# Altium PCB SUBBOARD-gate_driver.PcbDoc
Units mm, origin at the board's own origin, x right, y up, seen from the top; angles counter-clockwise.
Board outline 21 x 23.5 mm, 4 copper layers (Top Layer, Int1 (GND), Int2 (PWR), Bottom Layer), stack 1.369 mm thick; 27 components, 19 nets, 77 pads, 36 vias.
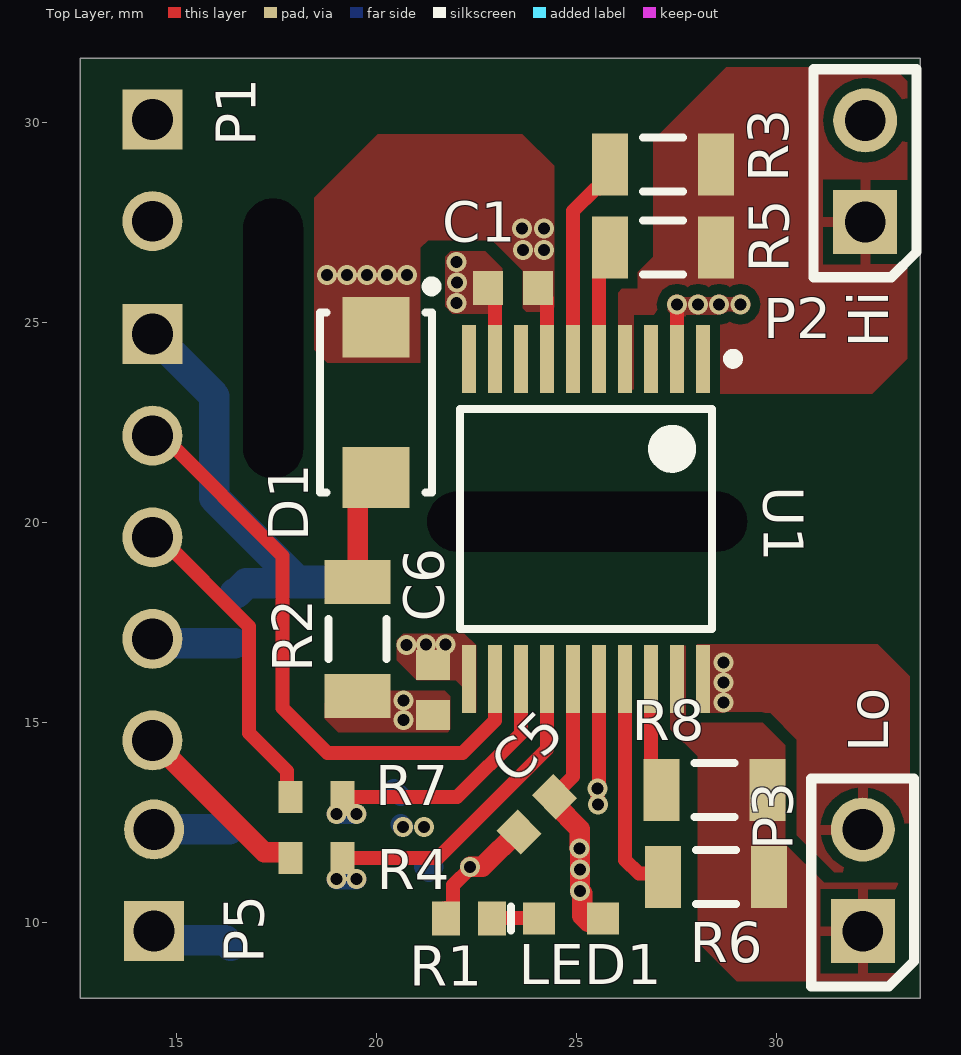
[diagram p0: Top Layer view]
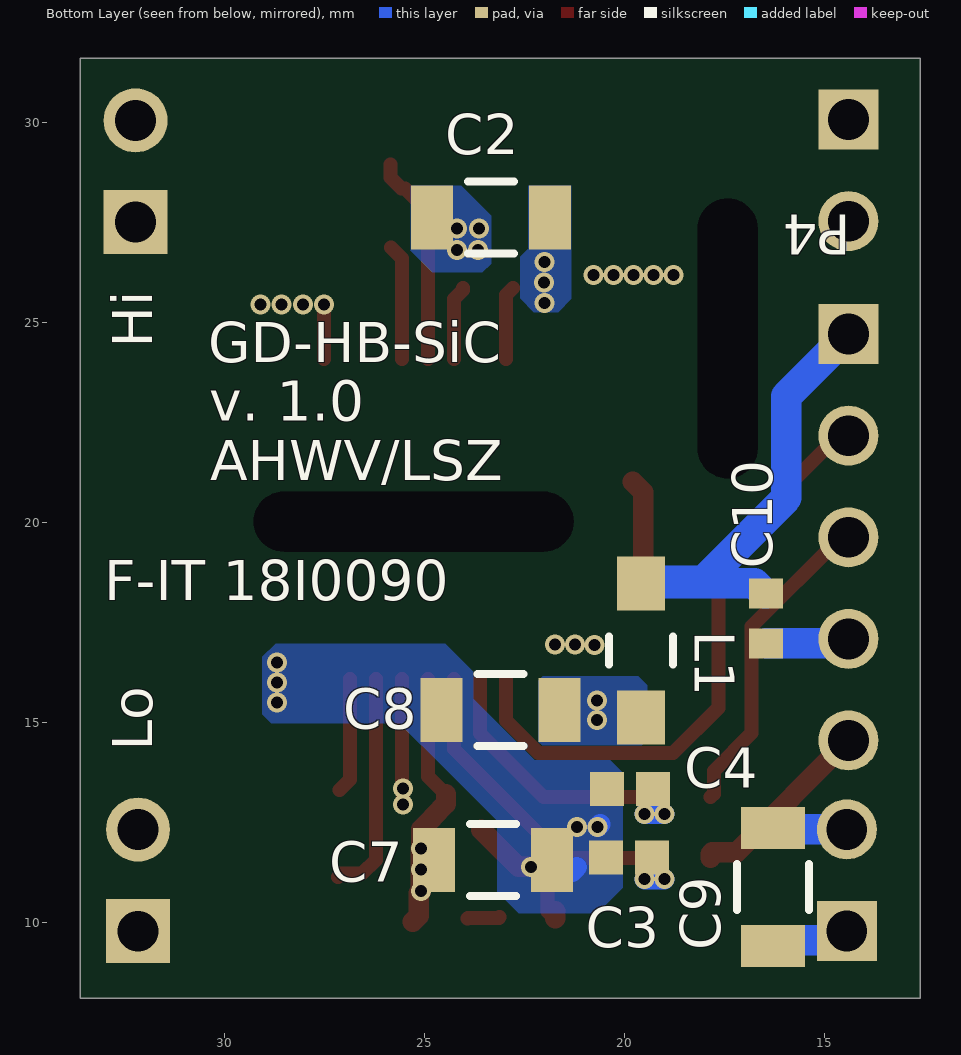
[diagram p1: Bottom Layer view, seen from below]
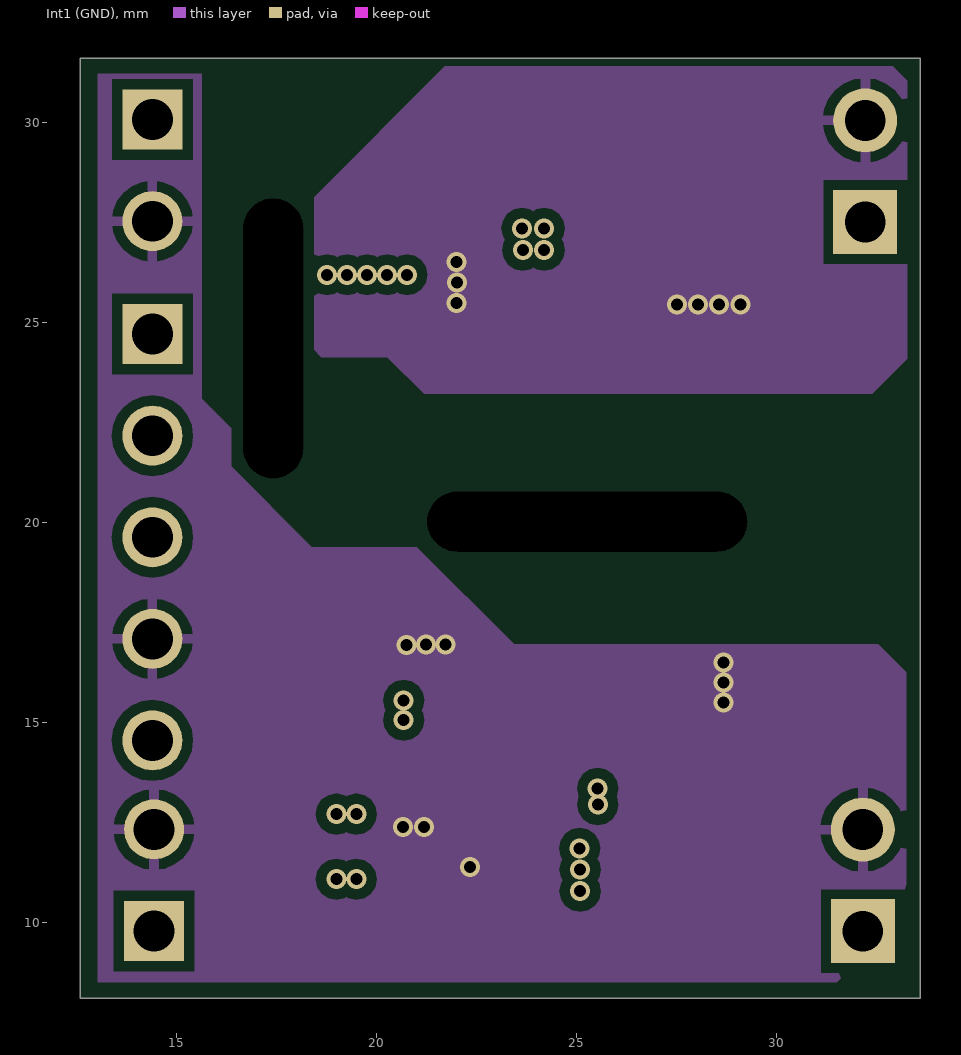
[diagram p2: Int1 (GND)]
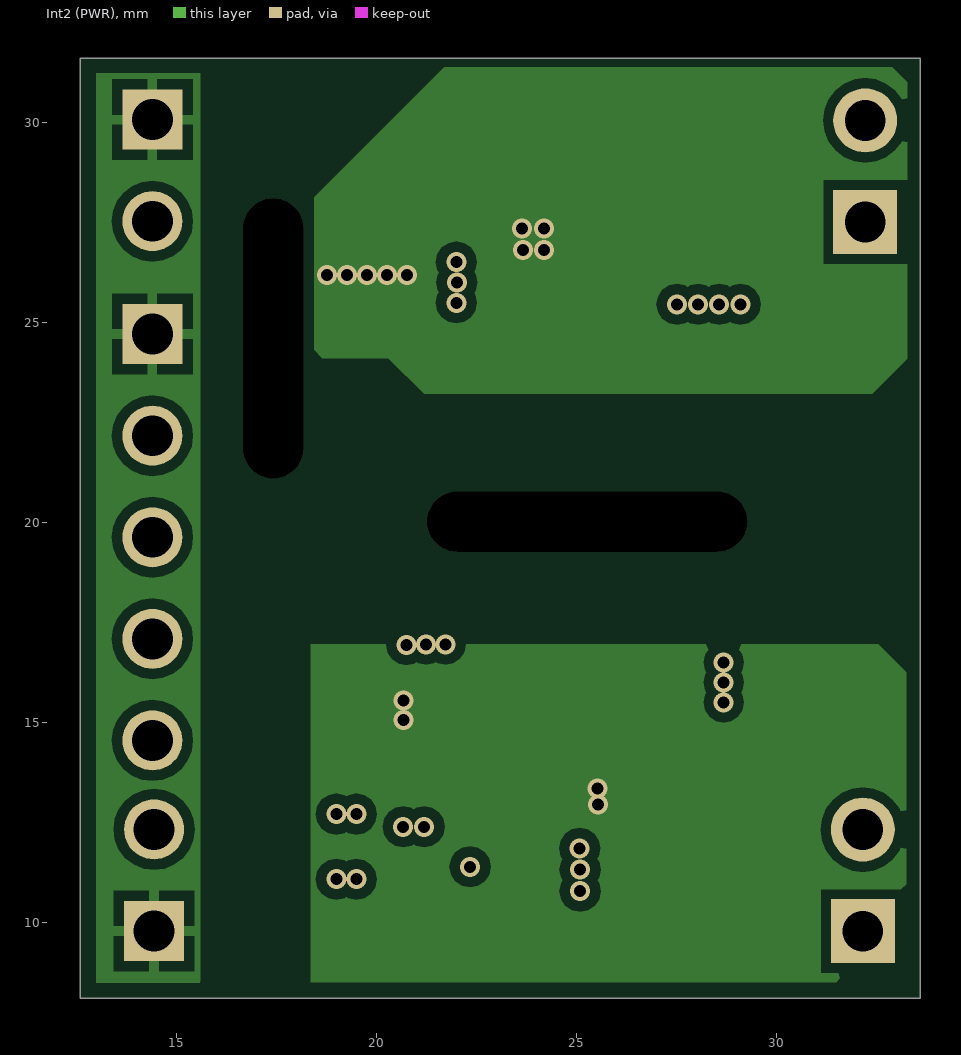
[diagram p3: Int2 (PWR)]
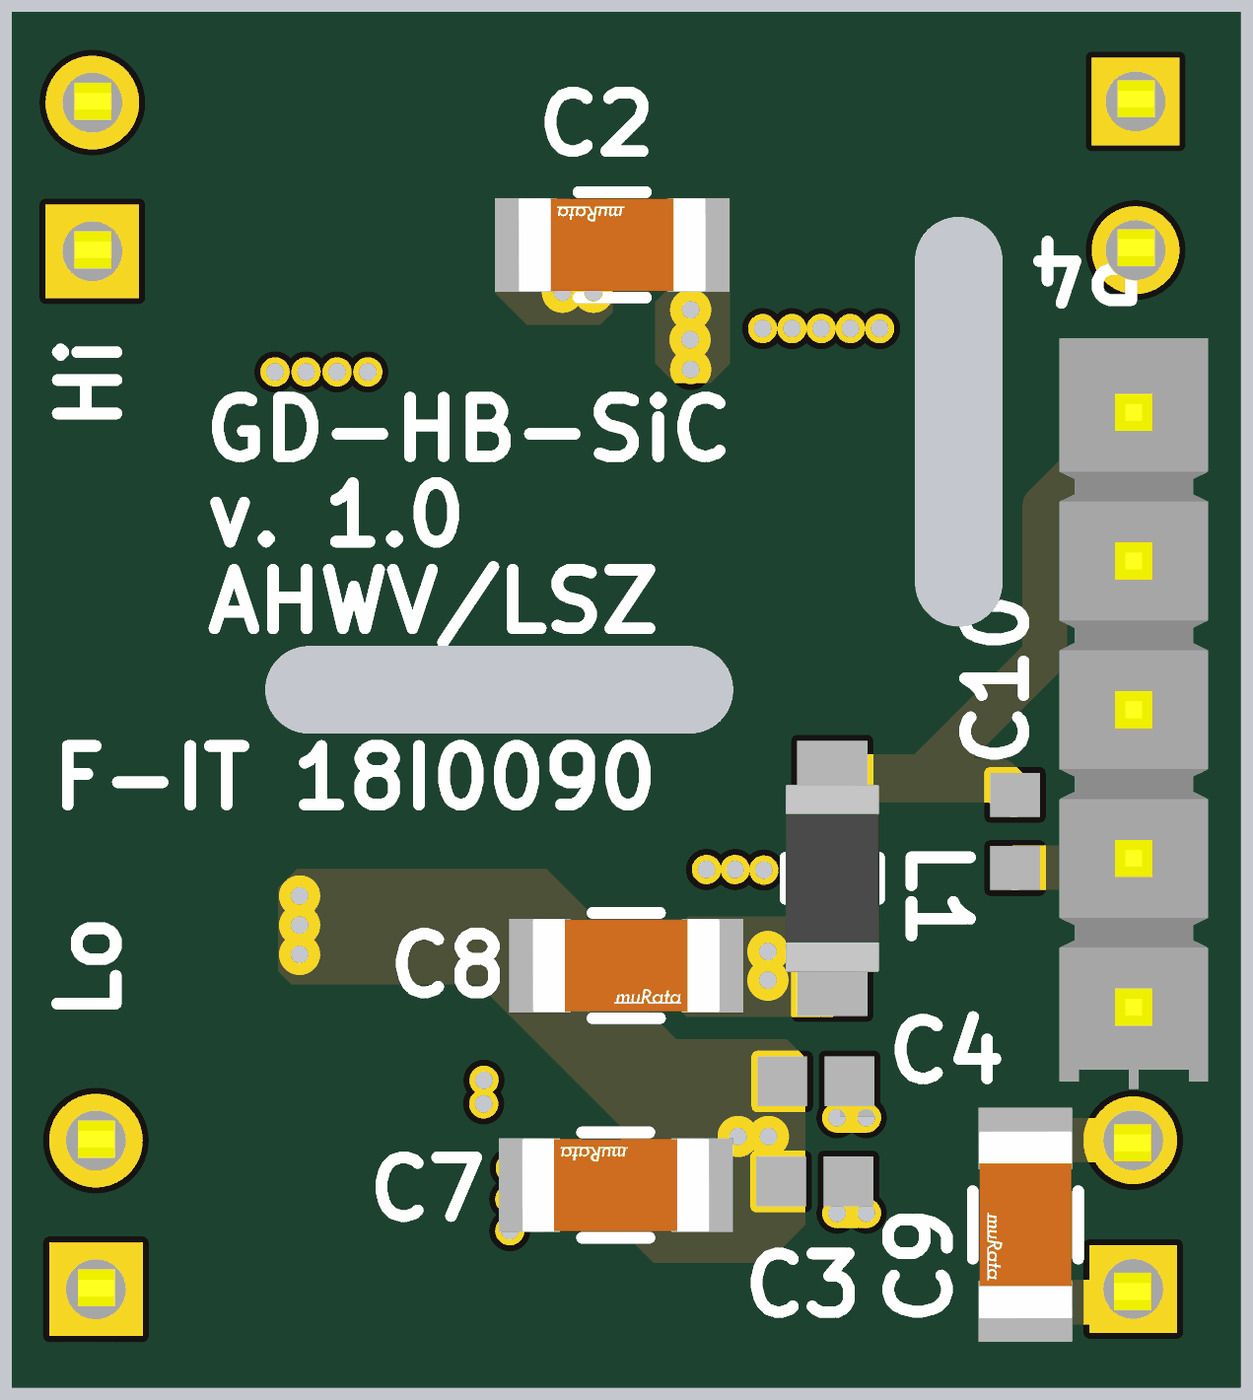
[diagram p4: 3D render of the assembled board from below, using the file's embedded part models]

## Layer stack, top to bottom
Top Solder: solder mask 0.0254, SM-001, Dk 4
Top Layer: signal copper 0.035
Dielectric 1: prepreg 0.1295, PP-017, Dk 4.3
Dielectric 2: prepreg 0.1295, PP-017, Dk 4.3
Int1 (GND): signal copper 0.035
Dielectric 3: core 0.7112, Core-039, Dk 4.8
Int2 (PWR): signal copper 0.035
Dielectric 4: prepreg 0.1295, PP-017, Dk 4.3
Dielectric 5: prepreg 0.1295, PP-017, Dk 4.3
Bottom Layer: signal copper 0.035
Bottom Solder: solder mask 0.0254, SM-001, Dk 4

## Board outline
12.6,8.11 12.6,31.61 33.6,31.61 33.6,8.11

## Design rules (kind name [scope] priority, off if disabled: settings)
Clearance [All] p1: gap=0.254 ignorepadtopadclearanceinfootprint=FALSE except(0: Arc-Hole Track-Hole SMDPad-Hole THPad-Hole Via-Hole Fill-Hole Poly-Hole Region-Hole Text-Hole)
PolygonConnect [All] p1: thpad.connectstyle=Relief thpad.reliefconductorwidth=0.254 thpad.reliefentries=4 thpad.polygonreliefangle="90 Angle" thpad.airgapwidth=0.254 smdpad.connectstyle=Direct smdpad.reliefconductorwidth=0.254 smdpad.reliefentries=4 smdpad.polygonreliefangle="90 Angle" smdpad.airgapwidth=0.254 via.connectstyle=Direct via.reliefconductorwidth=0.254 via.reliefentries=4 via.polygonreliefangle="90 Angle" via.airgapwidth=0.254
RoomDefinition SUBBOARD-gate_driver [InComponentClass('SUBBOARD-gate_driver')] p1: confinementstyle=ConfineIn formatcopy=TRUE lockcomponents=FALSE outline 2.76,4.09 112.325,4.09 112.325,66.3 2.76,66.3
RoutingVias [All] p1: holewidth=0.3 width=0.5 viastyle="Through Hole" minholewidth=0.3 minwidth=0.5 maxholewidth=1 maxwidth=2
SolderMaskExpansion [All] p1: expansion=0.102 istentingtop=FALSE
Width Width_G [InNet('G')] p1: maxlimit=1.016 minlimit=0.254 preferedwidth=0.381 minimp=50.000000 maximp=50.000000 favimp=50.000000
Width [All] p2: maxlimit=0.762 minlimit=0.254 preferedwidth=0.35 minimp=50.000000 maximp=50.000000 favimp=50.000000
30 further rules are at their usual default settings.

## Components (designator, comment, footprint, x,y, rotation, side; value= is the part's Value field where it differs from the comment)
C1 "CL10B104KB8NNNC" SAMS-C0603-2_L 23.41,25.87 r180 top
C2 "GRT31CR61H106KE01L" FP-GRT31-0_2-MFG 23.34,27.63 r0 bottom value=10uF
C3 "LMK107B7105KA-T" CAPC1608X90X35LL10T25 19.88,11.63 r0 bottom
C4 "LMK107B7105KA-T" CAPC1608X90X35LL10T25 19.86,13.34 r0 bottom
C5 "CL10B104KB8NNNC" SAMS-C0603-2_L 24.01,12.71 r225 top
C6 "CL10B104KB8NNNC" SAMS-C0603-2_L 21.42,15.82 r90 top
C7 "GRT31CR61H106KE01L" FP-GRT31-0_2-MFG 23.28,11.57 r0 bottom value=10uF
C8 "GRT31CR61H106KE01L" FP-GRT31-0_2-MFG 23.1,15.32 r180 bottom value=10uF
C9 "GRT31CR61H106KE01L" FP-GRT31-0_2-MFG 16.28,10.89 r270 bottom value=10uF
C10 "CL10B104KB8NNNC" SAMS-C0603-2_L 16.46,17.61 r270 bottom
D1 "BYG23T-M3/TR" BYG23T-M3/TR 19.99,23.01 r270 top
L1 "742792121" SMD-1206 19.58,16.81 r270 bottom
LED1 "150060BS75000" 0603_A 24.86,10.11 r0 top
P1 "TSW-102-05-G-S" TSW-102-05-G-S 14.4,30.08 r0 top
P2 "TSW-102-07-F-S" TSW-102-07-F-S 32.22,27.52 r90 top
P3 "TSW-102-07-F-S" TSW-102-07-F-S 32.16,9.79 r90 top
P4 "TSW-105-07-G-S" TSW-105-07-G-S 14.4,24.719 r180 bottom
P5 "TSW-102-05-G-S" TSW-102-05-G-S 14.44,9.796 r180 top
R1 "CRCW060382R0FKEA" RESC1609X50X30LL10T20 22.32,10.11 r180 top value="82 Ohms"
R2 "ERJ8BQF2R2V" RESC3216X70X50NL05T20 19.53,17.09 r90 top
R3 "ERJ8BWFR100V" RESC3216X70X50LL05T20 27.16,28.96 r180 top value="0.1 Ohm"
R4 "RC0603FR-070RL" RESC1608X55X25LL10T15 18.5,11.62 r180 top
R5 "ERJ8BWFR100V" RESC3216X70X50LL05T20 27.16,26.88 r180 top value="0.1 Ohm"
R6 "ERJ8BWFR100V" RESC3216X70X50LL05T20 28.49,11.15 r180 top value="0.1 Ohm"
R7 "RC0603FR-070RL" RESC1608X55X25LL10T15 18.5,13.14 r180 top
R8 "ERJ8BWFR100V" RESC3216X70X50LL05T20 28.45,13.32 r180 top value="0.1 Ohm"
U1 "BM60212FV" SOP65P810X190-20N 25.24,20.1 r270 top

## Footprints (in the part's own frame and the unit in brackets; to place one, negate y for a bottom-side part, rotate by r counter-clockwise, add the part's x,y. Pads: shape width x height; smd on the part's side, far side on the other; paste and mask are expansions set on the pad)
0603_A [mm] "Chip LED, 2-Leads, Body 1.6x0.8mm, IPC Medium Density"
  rect 0.8x0.8 smd: 1(-0.8,0) 2(0.8,0)
  silkscreen extent -1.5,-0.3 -1.5,0.3, body extent -0.8,-0.4 0.8,0.4, height 0.7
BYG23T-M3/TR [mm] "Fast / Ultrafast Diode, 1.3 kV, 1 A, Single, 1.9 V, 75 ns, 18 A"
  rect 1.52x1.68 smd: 1(-1.88,0) 2(1.88,0)
  silkscreen extent -3.02,-1.4 2.25,1.52, body extent -2.25,-1.39 2.25,1.4, height 2.29
CAPC1608X90X35LL10T25 [mm] "Chip Capacitor, 2-Leads, Body 1.70x0.90mm, IPC High Density"
  rect 0.85x0.85 smd: 1(-0.575,0) 2(0.575,0)
  body extent -0.85,-0.45 0.85,0.45, height 0.9
FP-GRT31-0_2-MFG [mm]
  rect 1.05x1.6 smd paste+0 mask+0: 1(-1.475,0) 2(1.475,0)
  silkscreen extent -0.58,-0.9 0.58,0.9, body extent -1.6,-0.8 1.6,0.8, height 1.8
RESC1608X55X25LL10T15 [mm] "Chip Resistor, 2-Leads, Body 1.60x0.80mm, IPC High Density"
  rect 0.6x0.8 smd: 1(-0.65,0) 2(0.65,0)
  body extent -0.85,-0.45 0.85,0.45, height 0.55
RESC1609X50X30LL10T20 [mm] "Chip Resistor, 2-Leads, Body 1.55x0.85mm, IPC High Density"
  rect 0.7x0.85 smd: 1(-0.575,0) 2(0.575,0)
  body extent -0.82,-0.48 0.82,0.48, height 0.5
RESC3216X70X50LL05T20 [mm] "Chip Resistor, 2-Leads, Body 3.20x1.60mm, IPC High Density"
  rect 0.9x1.55 smd: 1(-1.325,0) 2(1.325,0)
  silkscreen extent -0.5,-0.67 0.5,0.67, body extent -1.63,-0.82 1.62,0.82, height 0.7
RESC3216X70X50NL05T20 [mm] "Chip Resistor, 2-Leads, Body 3.20x1.60mm, IPC Medium Density"
  rect 1.1x1.65 smd: 1(-1.425,0) 2(1.425,0)
  silkscreen extent -0.5,-0.72 0.5,0.72, body extent -1.63,-0.82 1.62,0.82, height 0.7
SAMS-C0603-2_L [mm] "Chip Capacitor, 2-Leads, Body 1.70x0.90mm, IPC High Density"
  rect 0.75x0.85 smd: 1(-0.625,0) 2(0.625,0)
  body extent -0.85,-0.45 0.85,0.45, height 0.9
SMD-1206 [mm] "Chip Inductor, 2-Leads, Body 3.2x1.6mm"
  rect 1.35x1.2 smd: 1(-1.675,0) 2(1.675,0)
  silkscreen extent -0.35,-0.8 0.35,0.8, body extent -1.6,-0.8 1.6,0.8, height 1.09
SOP65P810X190-20N [mm] "SOP, 20-Leads, Body 6,50x6,10mm, Pitch 0,65mm, IPC Medium Density"
  rect 1.7x0.35 smd: 1(-4,2.925) 2(-4,2.275) 3(-4,1.625) 4(-4,0.975) 5(-4,0.325) 6(-4,-0.325) 7(-4,-0.975) 8(-4,-1.625) 9(-4,-2.275) 10(-4,-2.925) 11(4,-2.925) 12(4,-2.275) 13(4,-1.625) 14(4,-0.975) 15(4,-0.325) 16(4,0.325) 17(4,0.975) 18(4,1.625) 19(4,2.275) 20(4,2.925)
  silkscreen extent -4.12,-3.15 2.75,3.8, body extent -3.15,-3.15 3.15,3.15, height 1.9
TSW-102-05-G-S [mm]
  rect 1.5x1.5 hole 1.02: 1(0,0)
  round 1.5 hole 1.02: 2(0,-2.54)
  body extent -1.28,-3.89 1.26,1.31, height 5.22
TSW-102-07-F-S [mm] "Conn Unshrouded Header HDR 2 POS 2.54mm Solder ST Thru-Hole"
  rect 1.6x1.6 hole 1.02: 1(0,0)
  round 1.6 hole 1.02: 2(2.54,0)
  silkscreen extent -1.38,-1.28 3.82,1.29, body extent -1.37,-1.26 3.83,1.28, height 8.38
TSW-105-07-G-S [mm]
  rect 1.5x1.5 hole 1.02: 1(0,0)
  round 1.5 hole 1.02: 2(0,-2.54) 3(0,-5.08) 4(0,-7.62) 5(0,-10.16)
  body extent -1.3,-11.51 1.24,1.32, height 8.39

## Part data
C1 C5 C6 C10: library part CMP-2000-05332-1, "Multi-layer Ceramic Capacitor, -55 to 125 degC, 2-Pin SMD (0603), RoHS, Tape and Reel", Capacitance=0.1µF, Case Size/Dimension=0603, Dielectric=X7R, Manufacturer="Samsung Electro-Mechanics", Rated Voltage=50V, Tolerance (%)=±10%, Datasheet URL=https://datasheet.ciiva.com/29198/456651-da-01-en-vs-kondensator-0605-29198839.pdf, Datasheet Version=Nov-10, Manufacturer URL=http://www.samsungsem.com/global/index.jsp
C2 C7 C8 C9: library part CMP-06035-000076-1, "CAP CER 10UF 50V X5R 1206", Capacitance=10uF, Manufacturer=Murata, Package=GRT31-0.2, Temperature="-55°C to +85°C", Temperature Characteristic=X5R, Temperature Coefficient=15%, Temperature Range High=+85°C, Temperature Range Low=-55°C, Tolerance=10%, Voltage Rating=50V, Automotive=Yes, Automotive Grade="Grade 3", Category=Cap, ComponentLink2Description=Datasheet, ComponentLink2URL=https://search.murata.co.jp/Ceramy/image/img/A01X/G101/ENG/GRT31CR61H106KE01-01.pdf, Device Class L1="Passive Components", Device Class L2=Capacitors, Device Class L3="Ceramic Capacitors", Digikey Description="CAP CER 10UF 50V X5R 1206", Height=1.8mm, Ipc Land Pattern Name=CAPC320160X160, Lead Free=Yes, Manufacturer Part Number=GRT31CR61H106KE01L, Material=Ceramic, Octopart=https://octopart.com/grt31cr61h106ke01l-murata-62921736, RoHS=TRUE
C3 C4: library part CMP-2000-05445-1, "High Value Multilayer Ceramic Capacitor, 1 uF, +/- 10%, 10 V, -55 to 125 degC, 0603 (1608 Metric), RoHS, Tape and Reel", Capacitance=1µF, Manufacturer="Taiyo Yuden", Operating Temperature=-55degC~125degC, Package / Case=0603(1608Metric), Package Description="2-Pin Surface Mount Device, Body 1.6 x 0.8 mm", Package Reference=603, PCN Part Number=X5R,X7RDielectrics23/Jan/2008, Ratings=-, Standard Package=1, Temperature Coefficient=X7R, Tolerance=±10%, Voltage - Rated=10V, Applications=GeneralPurpose, Catalog Drawings=xMKSeries_0603_0.8, Category=Capacitors, Datasheet URL=https://datasheet.ciiva.com/30248/464lmk107b7105ka-t-30248417.pdf, Datasheet Version=Apr-14, Family=CeramicCapacitors, Features=-, Height - Seated (Max)=-, Kits=587-1797-KIT-ND-KITCAPCERHICAP0603&0805S, Lead Spacing=-, Lead Style=-, Manufacturer URL=http://www.t-yuden.com/, Mounting Type=SurfaceMount,MLCC, Online Catalog=MSeries, Other Names=587-1242-1, Packaging=CutTape(CT), Series=M, Size / Dimension="0.063\"Lx0.031\"W(1.60mmx0.80mm)", Thickness (Max)="0.035\"(0.90mm)"
D1: "DIODE AVALANCHE 1300V 1A DO214AC", Average Rectified Current=1A, Case/Package=SMA, Forward Voltage=1.9V, Manufacturer="Vishay Semiconductors", Max Forward Surge Current (Ifsm)=18A, Max Operating Temperature=150°C, Max Power Dissipation=800mW, Max Repetitive Reverse Voltage (Vrrm)=1.3kV, Min Operating Temperature=-55°C, Package Quantity=1, Peak Reverse Current=5uA, Supplier Part Number 1=70AC6454, Zener Voltage=200V, Category="Rectifier Diodes", ComponentLink1Description=https://datasheet.ciiva.com/23642/byg23t-23642320.pdf?src-supplier=Newark, ComponentLink1URL=https://datasheet.ciiva.com/23642/byg23t-23642320.pdf?src-supplier=Newark, ComponentLink2Description=https://datasheet.ciiva.com/30479/0900766b810d43bd-30479333.pdf?src-supplier=RSComponents, ComponentLink2URL=https://datasheet.ciiva.com/30479/0900766b810d43bd-30479333.pdf?src-supplier=RSComponents, ComponentLink3Description=https://datasheet.ciiva.com/4454/byg23t-85630-4454047.pdf?src-supplier=Mouser, ComponentLink3URL=https://datasheet.ciiva.com/4454/byg23t-85630-4454047.pdf?src-supplier=Mouser, ComponentLink4Description=https://datasheet.ciiva.com/920/byg23t-920130.pdf?src-supplier=Digi-Key, ComponentLink4URL=https://datasheet.ciiva.com/920/byg23t-920130.pdf?src-supplier=Digi-Key, ComponentLink5Description=https://datasheet.ciiva.com/920/byg23t-920131.pdf?src-supplier=Digi-Key, ComponentLink5URL=https://datasheet.ciiva.com/920/byg23t-920131.pdf?src-supplier=Digi-Key, ComponentLink6Description=https://datasheet.ciiva.com/920/byg23t-920132.pdf?src-supplier=Digi-Key, ComponentLink6URL=https://datasheet.ciiva.com/920/byg23t-920132.pdf?src-supplier=Digi-Key, ComponentLink7Description=https://datasheet.ciiva.com/1178/byg23t-1178213.pdf?src-supplier=Element14, ComponentLink7URL=https://datasheet.ciiva.com/1178/byg23t-1178213.pdf?src-supplier=Element14, Contact Plating=Tin,Matte, Diode Type=Avalanche, Element Configuration=Single, Forward Current=1A, Height=2.29mm, Length=4.5mm, Manufacturer Part Number=BYG23T-M3/TR, Max Reverse Voltage (DC)=1.3kV, Max Surge Current=18A, Mount="Surface Mount", Number of Pins=2, Packaging="Tape and Reel", Peak Non-Repetitive Surge Current=18A, Pricing 1="1=0.16100, 10=0.16100, 25=0.16100, 50=0.16100, 100=0.16100, 250=0.16100, 500=0.16100, 1000=0.14800 (USD)", Radiation Hardening=No, REACH SVHC=Unknown, Recovery Time=75ns, Reverse Recovery Time=75ns, Reverse Voltage=1.3kV, RoHS=Yes, Stock 1=6980, Supplier 1=Newark, Width=2.79mm
L1: library part CMP-0220-00006-1, "SMD EMI Suppression Ferrite Bead WE-CBF, Z = 300 Ohm", ComponentLink1Description="Manufacturer Link", ComponentLink1URL=http://www.we-online.com, ComponentLink2Description=Datasheet, ComponentLink2URL=http://www.we-online.de/katalog/media/pdf/742792121.pdf, DatasheetVersion=Dec-2005, Impedance="300 Ohm", PackageDescription="Chip Inductor, 2-Leads, Body 3.2 x 1.6 mm", PackageReference=SMD-1206, PackageVersion=2007
LED1: library part CMP-1426-00003-1, "SMD mono-color Chip LED, WL-SMCW, Blue", Color=Blue, Manufacturer="Wuerth Elektronik", ComponentLink1Description="Manufacturer URL", ComponentLink1URL=http://www.we-online.com, ComponentLink2Description=Datasheet, ComponentLink2URL=http://katalog.we-online.com/led/datasheet/150060BS75000.pdf, PackageReference=0603_A, PartNumber=150060BS75000
P1 P5: "Conn Unshrouded Header HDR 2 POS 2.54mm Solder ST Thru-Hole Automotive Bulk", Color=Black, Manufacturer=Samtec, Max Current Rating=7.6A, Max Operating Temperature=125°C, Max Voltage Rating (AC)=550V, Min Operating Temperature=-55°C, Package Quantity=1, Supplier Part Number 1=SAM1013-02-ND, Category=Connectors, ComponentLink1Description=http://components.arrow.com/part/dataview/0323_03819665?src-supplier=Arrow+Europe, ComponentLink1URL=http://components.arrow.com/part/dataview/0323_03819665?src-supplier=Arrow+Europe, ComponentLink2Description=http://components.arrow.com/part/dataview/2679278S8183086N1004?src-supplier=Arrow, ComponentLink2URL=http://components.arrow.com/part/dataview/2679278S8183086N1004?src-supplier=Arrow, ComponentLink3Description=http://www.farnell.com/datasheets/2571078.pdf?src-supplier=Farnell, ComponentLink3URL=http://www.farnell.com/datasheets/2571078.pdf?src-supplier=Farnell, ComponentLink4Description=http://www.farnell.com/datasheets/1992055.pdf?src-supplier=Farnell, ComponentLink4URL=http://www.farnell.com/datasheets/1992055.pdf?src-supplier=Farnell, ComponentLink5Description=http://www.samtec.com/ftppub/pdf/htsw_th.pdf?src-supplier=Avnet, ComponentLink5URL=http://www.samtec.com/ftppub/pdf/htsw_th.pdf?src-supplier=Avnet, ComponentLink6Description=http://suddendocs.samtec.com/prints/tsw-xxx-xx-x-x-xx-xxx-footprint.pdf?src-supplier=Digi-Key, ComponentLink6URL=http://suddendocs.samtec.com/prints/tsw-xxx-xx-x-x-xx-xxx-footprint.pdf?src-supplier=Digi-Key, Connector Type="Male Pin", Contact Material=Bronze, Contact Mating Length=0.105inch, Contact Plating=Gold, Depth=2.54mm, Gender=Male, Housing Color=Black, Housing Material=Polyester, Lead Free="Lead Free", Length=5.08mm, Manufacturer Part Number=TSW-102-05-G-S, Mount="Through Hole", Number of Contacts=2, Number of Positions=2, Number of Rows=1, Orientation=Straight, Packaging=Bulk, Pitch=2.54mm, Pricing 1="1=0.28000, 10=0.26500, 25=0.22760, 50=0.19340, 100=0.18580, 250=0.16684, 500=0.15926 (USD)", Radiation Hardening=No, REACH SVHC="No SVHC", RoHS=Yes, Stock 1=277, Supplier 1=Digi-Key, Termination=Solder, Width=2.54mm
P2 P3: "Conn Unshrouded Header HDR 2 POS 2.54mm Solder ST Thru-Hole", Color=Black, Manufacturer=Samtec, Max Current Rating=7.6A, Max Operating Temperature=125°C, Max Voltage Rating (AC)=550V, Min Operating Temperature=-55°C, Package Quantity=1, Supplier Part Number 1=SAM10844-ND, Category=Connectors, ComponentLink1Description=https://datasheet.ciiva.com/739/tsw-xxx-xx-xxx-x-xx-xxx-mkt-739881.pdf?src-supplier=Digi-Key, ComponentLink1URL=https://datasheet.ciiva.com/739/tsw-xxx-xx-xxx-x-xx-xxx-mkt-739881.pdf?src-supplier=Digi-Key, ComponentLink2Description=https://datasheet.ciiva.com/10281/htsw-th-10281262.pdf?src-supplier=Avnet, ComponentLink2URL=https://datasheet.ciiva.com/10281/htsw-th-10281262.pdf?src-supplier=Avnet, ComponentLink3Description=https://datasheet.ciiva.com/16734/htsw-th-16734219.pdf?src-supplier=Avnet+Europe, ComponentLink3URL=https://datasheet.ciiva.com/16734/htsw-th-16734219.pdf?src-supplier=Avnet+Europe, Connector Type="Male Pin", Contact Material=Bronze, Contact Mating Length=0.23inch, Contact Plating=Gold, Depth=2.54mm, Gender=Male, Housing Color=Black, Housing Material=Polyester, Length=5.08mm, Manufacturer Part Number=TSW-102-07-F-S, Mount="Through Hole", Number of Contacts=2, Number of Positions=2, Number of Rows=1, Orientation=Straight, Packaging=Rail/Tube, Pitch=2.54mm, Pricing 1="1=0,20000, 10=0,18800, 100=0,13000, 500=0,11000, 1000=0,09000, 5000=0,08000, 10000=0,07250 (USD)", Radiation Hardening=No, REACH SVHC="No SVHC", RoHS=Yes, Stock 1=10739, Supplier 1=Digi-Key, Supplier 2=Arrow, Supplier 3=Mouser, Supplier 4=Farnell, Supplier 5=Newark, Supplier Part Number 2=TSW-102-07-F-S, Supplier Part Number 3=200-TSW10207FS, Supplier Part Number 4=2779661, Supplier Part Number 5=79P3146, Termination=Solder
P4: "SAMTEC - TSW-105-07-G-S - Board-To-Board Connector, 2.54 mm, 5 Contacts, Header, TSW Series, Through Hole, 1 Rows", Color=Black, Manufacturer=Samtec, Max Current Rating=7.6A, Max Operating Temperature=125°C, Max Voltage Rating (AC)=550V, Min Operating Temperature=-55°C, Package Quantity=1, Supplier Part Number 1=SAM1029-05-ND, Category="Headers and Wire Housings", ComponentLink1Description=https://datasheet.ciiva.com/6888/tsw-xxx-xx-xxx-x-xx-xxx-mkt-6888902.pdf?src-supplier=Digi-Key, ComponentLink1URL=https://datasheet.ciiva.com/6888/tsw-xxx-xx-xxx-x-xx-xxx-mkt-6888902.pdf?src-supplier=Digi-Key, ComponentLink2Description=https://datasheet.ciiva.com/16724/htsw-th-16724458.pdf?src-supplier=Avnet+Europe, ComponentLink2URL=https://datasheet.ciiva.com/16724/htsw-th-16724458.pdf?src-supplier=Avnet+Europe, ComponentLink3Description=https://datasheet.ciiva.com/48561/htsw-th-48561324.pdf?src-supplier=Avnet, ComponentLink3URL=https://datasheet.ciiva.com/48561/htsw-th-48561324.pdf?src-supplier=Avnet, Connector Type="Male Pin", Contact Material=Bronze, Contact Mating Length=0.23inch, Contact Plating=Gold, Depth=2.54mm, Gender=Male, Housing Color=Black, Housing Material=Polyester, Lead Free="Lead Free", Length=12.7mm, Manufacturer Part Number=TSW-105-07-G-S, Mount="Through Hole", Number of Contacts=5, Number of Positions=5, Number of Rows=1, Orientation=Straight, Packaging=Bulk, Pitch=2.54mm, Pricing 1="1=0.55000, 10=0.51100, 25=0.46000, 50=0.40900, 100=0.39190, 250=0.35784, 500=0.34080 (USD)", Radiation Hardening=No, REACH SVHC="No SVHC", RoHS=Yes, Stock 1=1466, Supplier 1=Digi-Key, Termination=Solder, Width=2.54mm
R1: library part CMP-2000-03606-1, Manufacturer="Vishay Dale", Part Number=CRCW060382R0FKEA
R2: library part CMP-2003-00737-1, Manufacturer=Panasonic, Part Number=ERJ8BQF2R2V
R3 R5 R6 R8: library part CMP-2003-00785-1, Manufacturer=Panasonic, Package=1206, Part Number=ERJ8BWFR100V
R4 R7: library part CMP-2000-06925-1, "Chip Resistor, 0 Ohm, +/- 1%, 100 mW, -55 to 155 degC, 0603 (1608 Metric), RoHS, Tape and Reel", Manufacturer=Yageo, Operating Temperature=-55°C~155°C, Package / Case=0603(1608Metric), Package Description="2-Pin Surface Mount Device, Body 1.6 x 0.8 mm", Package Reference=0603, Power (Watts)=0.1W,1/10W, Resistance (Ohms)=0.0, Standard Package=5,000, Temperature Coefficient=-, Tolerance=Jumper, Catalog Drawings=ThickFilmResistorSide, Category=Resistors, Composition=ThickFilm, Datasheet URL=http://www.yageo.com/documents/recent/PYu-RC_Group_51_RoHS_L_7.pdf, Datasheet Version="Rev. 7, 05/2017", EDA / CAD Models=DownloadfromAcceleratedDesigns, Family=ChipResistor-SurfaceMount, Features=MoistureResistant, Height="0.022\"(0.55mm)", HTML Datasheet=RCSeries,LSuffixDatasheet.html, Manufacturer URL=http://www.yageo.com/, Mounting Technology=SurfaceMount, Number of Terminations=2, Online Catalog=RC0603Series, Other Names=311-0.0HRTRQ3106287ARC0603FR-070RL-ND, Packaging=Tape&Reel(TR), PCN Other=RC/AC0603/0805/120622/Jan/2013, Product Training Modules=ChipResistor, Series=RC, Size / Dimension="0.063\"Lx0.031\"W(1.60mmx0.80mm)", Supplier Device Package=0603
U1: library part BM60212FV-CE2, "MOSFET and Power Driver 2-OUT Hi/Lo Side Non-Inv 20-Pin SSOP-BW Emboss T/R", Manufacturer=Rohm, Supplier Part Number 1=BM60212FV-CE2CT-ND, Manufacturer Part Number=BM60212FV-CE2, Pricing 1="1=4,24000, 10=3,80800, 25=3,60000, 100=2,96000, 250=2,65600, 500=2,56000, 1000=2,24000 (USD)", Stock 1=1999, Supplier 1=DigiKey, Supplier 2=Digi-Key, Supplier 3=Digi-Key, Supplier 4=Mouser, Supplier 5=Farnell, Supplier 6=Newark, Supplier Part Number 2=BM60212FV-CE2CT-ND, Supplier Part Number 3=BM60212FV-CE2DKR-ND, Supplier Part Number 4=755-BM60212FV-CE2, Supplier Part Number 5=3011496, Supplier Part Number 6=01AH6823

## Free pads (board coordinates)
  round 1 hole 1.5 slot 7 at 90 deg unplated: 2(17.42,24.61)
  round 1 hole 1.5 slot 8 at 0 deg unplated: 2(25.27,20.03)

## Via types
v1: diameter 0.5, hole 0.3, Top Layer to Bottom Layer, 36 vias

## Nets (pads, with @x,y where several pads share a name; then routed paths per layer and width w, separated by ;. In a path a pad name is that pad's centre, name@x,y a point inside that pad or via, vN(x,y) a via of type N, cw(c..) or ccw(c..) an arc to the next point about the centre after c; other vN are vias at no path point)
ENA: P4.2 U1.12 | length 15.5
  Top Layer w0.35: P4.2 14.651,22.179 17.654,19.176 17.654,15.366 18.78,14.24 22.15,14.24 22.965,15.055 U1.12
GA: P2.1 R3.1 R5.1 U1.4
GB: P3.1 R6.1 R8.1 U1.19
INA: C3.1 R4.1 U1.14 | length 8.5
  Top Layer w0.35: R4.1 21.54,11.62 24.265,14.345 U1.14
  Bottom Layer w0.508: v1(19,11.09) v1(19.5,11.09)
INB: C4.1 R7.1 U1.13 | length 7
  Top Layer w0.35: R7.1 22.02,13.14 23.615,14.735 U1.13
  Bottom Layer w0.508: v1(19,12.72) v1(19.5,12.72)
NetD1_2: D1.2 R2.2 | length 2.6
  Top Layer w0.508: R2.2@19.54,18.525 R2.2 19.53,20.77 D1.2@19.79,21.03
NetLED1_1: LED1.1 R1.1 | length 0.8
  Top Layer w0.35: R1.1@23.125,10.14 23.14,10.125 23.905,10.125 LED1.1@23.92,10.11
OUTAH: R3.2 U1.6 | length 5.3
  Top Layer w0.35: U1.6 24.915,27.792 25.483,28.36 25.57,28.36 25.845,28.635 R3.2@25.845,28.96
OUTAL: R5.2 U1.5 | length 2.9
  Top Layer w0.35: U1.5 25.565,26.61 R5.2
OUTBH: R6.2 U1.17 | length 5.7
  Top Layer w0.35: U1.17 26.215,11.575 26.56,11.23 27.085,11.23 R6.2
OUTBL: R8.2 U1.18 | length 2.9
  Top Layer w0.35: U1.18 26.865,13.58 R8.2
PWMA: P4.5 R4.2 | length 5
  Top Layer w0.508: P4.5 17.193,11.766 17.804,11.766 17.85,11.72 R4.2 ; P4.5@14.4,14.749 P4.5@14.59,14.559
PWMB: P4.3 R7.2 | length 8.3
  Top Layer w0.35: P4.3 14.59,19.639 16.82,17.409 16.82,14.74 17.764,13.796 17.764,13.226 R7.2 ; P4.3@14.5,19.39 P4.3@14.5,19.61
SA: C1.2 C2.1 P2.2 U1.2 U1.9 | length 3.2
  Top Layer w0.35: C1.2 22.965,25.69 U1.9 ; v1@27.5,25.47 27.515,25.455 U1.2
  other v1: 27.515,25.46 28.04,25.46 28.57,25.46 29.1,25.46 22,25.5 22.01,26.01 22,26.52
SB: C3.2 C4.2 C5.2 C6.2 C7.1 C8.1 C9.1 C10.2 P1.2 P3.2 P4.4 P5.2 R1.2 U1.11 U1.20 | length 8.4
  Top Layer w0.35: R1.2 21.92,10.285 21.92,10.939 22.34,11.359 v1(22.34,11.4)
  Top Layer w0.508: P4.4@14.21,17.289 P4.4 ; P4.4@14.396,17.384 P4.4@14.4,17.38 ; P4.4@14.415,17.475 P4.4@14.42,17.47 ; R1.2@21.73,10.11 R1.2@21.73,10.29 ; v1(22.34,11.4) 22.65,11.4 C5.2@23.578,12.328
  Bottom Layer w0.508: C4.2 C4.2@20.606,13.169 ; v1@20.606,12.464 v1(20.67,12.4) ; 21.19,11.395 21.305,11.28 C7.1@21.425,11.4
  Bottom Layer w0.762: P1.2@14.361,27.501 P1.2 ; P4.4 14.508,16.991 16.454,16.991 C10.2 ; P5.2@14.44,12.3 14.477,12.338 16.322,12.338 C9.1@16.36,12.375
  other v1: 21.19,12.4 28.68,15.51 28.68,16.01 28.68,16.51 20.75,16.95 21.24,16.96 21.73,16.96
VDD_18V: C9.2 C10.1 L1.1 P1.1 P4.1 P5.1 | length 14.5
  Bottom Layer w0.762: P4.1 15.95,23.169 15.95,20.621 18.025,18.547 19.518,18.547 L1.1 16.748,18.485 16.498,18.235 C10.1 ; P5.1@14.44,9.76 14.631,9.569 16.216,9.569 C9.2@16.36,9.425
VDDA: C1.1 C2.2 D1.1 U1.7 | length 1.9
  Top Layer w0.35: C1.1 24.035,25.82 24.265,25.59 U1.7
  other v1: 18.77,26.2 19.27,26.2 19.77,26.2 20.27,26.2 20.77,26.2 23.66,26.82 24.19,26.82 23.64,27.36 24.19,27.36
VDDB: C6.1 C8.2 L1.2 R2.1 U1.16 | length 3.2
  Top Layer w0.35: v1(25.536,12.957) 25.533,12.96 25.533,13.357 v1(25.53,13.36) 25.53,13.401 25.565,13.436 U1.16
  other v1: 20.68,15.07 20.68,15.56
VREG: C5.1 C7.2 LED1.2 U1.15 | length 6.5
  Top Layer w0.35: C5.1@24.512,13.259 24.915,13.662 U1.15
  Top Layer w0.508: C5.1@24.462,13.212 24.462,12.971 24.778,12.655 24.778,12.643 25.08,12.341 v1(25.08,11.86) 25.09,11.85 v1(25.09,11.33) v1(25.09,10.79) 25.144,10.736 25.144,10.176 LED1.2@25.29,10.03
pads on no net: U1.1 U1.3 U1.8 U1.10

## Polygon pours and split planes (outlines as drawn)
SA on Int1 (GND) "Poly_SA" (solid, pour order 7): 21.71,31.41 32.91,31.41 33.27,31.05 33.27,24.1 32.4,23.23 21.19,23.23 20.275,24.145 18.625,24.145 18.44,24.33 18.44,28.14
SB on Int1 (GND) "Poly_SB" (solid, pour order 8): 13.03,31.23 15.63,31.23 15.63,23.1 16.37,22.36 16.37,21.41 18.387,19.393 21.007,19.393 23.44,16.96 32.54,16.96 33.24,16.26 33.24,10.25 31.51,8.52 13.03,8.52
no net on Int1 (GND) "NONET_L02_P000" (solid, pour order 0): 120.904,80.899
VDDB on Int2 (PWR) "Poly_VDDB" (solid, pour order 11): 33.24,16.26 32.54,16.96 18.36,16.96 18.36,8.52 31.49,8.52 33.24,10.27
VDDA on Int2 (PWR) "Poly_VDDA" (solid, pour order 10): 33.27,24.1 33.27,31.02 32.9,31.39 21.69,31.39 18.44,28.14 18.44,24.33 18.65,24.12 20.3,24.12 21.19,23.23 32.4,23.23
VDD_18V on Int2 (PWR) "Poly_VDD_18V" (solid, pour order 24): 11.54,31.26 11.56,31.24 15.6,31.24 15.6,8.55 15.65,8.5 12.99,8.5 12.99,31.26
no net on Int2 (PWR) "NONET_L03_P002" (solid, pour order 2): 128.778,62.865
VDDA on Top Layer "Poly_VDDA_Top" (solid, pour order 19): 18.77,24 18.44,24.33 18.44,28.13 20.03,29.72 23.65,29.72 24.44,28.93 24.44,25.39 24.33,25.28 23.75,25.28 23.66,25.37 23.66,26.3 22.89,27.07 21.29,27.07 21.1,26.88 21.1,24
SB on Top Layer "Poly_SB_Top" (solid, pour order 13): 33.33,16.167 33.33,11.18 31.52,11.18 30.51,12.19 30.51,14.58 29.84,15.25 28,15.25 27.98,15.27 27.98,16.96 32.537,16.96 32.687,16.81
GB on Top Layer "Poly_GB" (solid, pour order 12): 27.35,14.84 28.03,14.16 28.03,9.52 29.01,8.54 33.13,8.54 33.31,8.72 33.31,10.81 33.12,11 31.19,11 30.22,11.97 30.22,14.44 29.66,15 27.851,15 27.851,16.93 27.35,16.93
GA on Top Layer "Poly_GA" (solid, pour order 9): 33.27,31.04 33.27,24.1 32.4,23.23 26.37,23.23 26.04,23.56 26.04,25.77 26.92,26.65 26.92,29.57 28.74,31.39 32.92,31.39
VDDB on Top Layer "Poly_VDDB_Top" (solid, pour order 21): 18.71,15.5 19.01,15.8 21.71,15.8 21.85,15.66 21.85,14.84 21.78,14.77 19.04,14.77 18.71,15.1
SA on Top Layer "Poly_SA_Top2" (solid, pour order 18): 29.34,25.61 29.061,25.889 27.43,25.889 27.23,25.689 27.23,25.35 27.41,25.17 29.2,25.17 29.34,25.31
SB on Top Layer "Poly_SB_Top2" (solid, pour order 17): 22.15,15.26 22.15,15.9 21.98,16.07 21.01,16.07 20.51,16.57 20.51,17.07 20.67,17.23 22.2,17.23 22.49,16.94 22.49,15.26
SA on Top Layer "Poly_SA_Top2" (solid, pour order 14): 23.15,26.36 22.72,26.79 21.86,26.79 21.72,26.65 21.72,25.41 21.9,25.23 22.94,25.23 23.15,25.44
VDDA on Bottom Layer "Poly_VDDA_Bot" (solid, pour order 23): 24.38,28.43 24.08,28.43 23.33,27.68 23.33,26.48 23.55,26.26 24.8,26.26 25.35,26.81 25.34,26.82 25.34,28.43
SA on Bottom Layer "Poly_SA_Bot" (solid, pour order 22): 21.33,28.44 21.33,25.6 21.66,25.27 22.27,25.27 22.61,25.61 22.61,26.65 22.39,26.87 22.4,26.88 22.4,28.43 21.34,28.43
VDDB on Bottom Layer "Poly_VDDB_Bot" (solid, pour order 20): 19.43,15.94 19.65,16.16 22.04,16.16 22.15,16.05 22.15,14.53 22.06,14.44 19.57,14.44 19.43,14.58
SB on Bottom Layer "Poly_SB_Bot" (solid, pour order 16): 20.04,13.75 20.04,10.88 20.68,10.24 22.64,10.24 23.18,10.78 23.18,12.55 24.49,13.86 25.625,14.995 28.825,14.995 29.05,15.22 29.05,16.65 28.72,16.98 24.48,16.98 23.78,16.28 23.78,15.6 22.24,14.06 20.35,14.06

## Silkscreen, mask and mechanical layers (free items; w line width, h text height)
Top Overlay:
  text "Hi" at 32.79,24.38 h1 r90
  text "Lo" at 32.8,14.27 h1 r90
Bottom Overlay:
  text "Hi" at 31.8,24.38 h1 r270
  text "GD-HB-SiC" at 30.4,24.01 h1
  text "v. 1.0" at 30.38,22.55 h1
  text "AHWV/LSZ" at 30.36,21.07 h1
  text "F-IT 18I0090" at 33.01,18.06 h1
  text "Lo" at 31.81,14.3 h1 r270
Board:
  the board outline again, w0.254

## Dimensions
12.6,31.61 to 33.6,31.61 on Dimensions
12.6,31.61 to 12.6,8.11 on Dimensions